# Altium PCB PowerSupply.PcbDoc
Units mm, origin at the board's own origin, x right, y up, seen from the top; angles counter-clockwise.
Board outline 68.61 x 30.48 mm, 2 copper layers (Top Layer, Bottom Layer), stack 1.586 mm thick; 29 components, 18 nets, 80 pads, 6 vias.
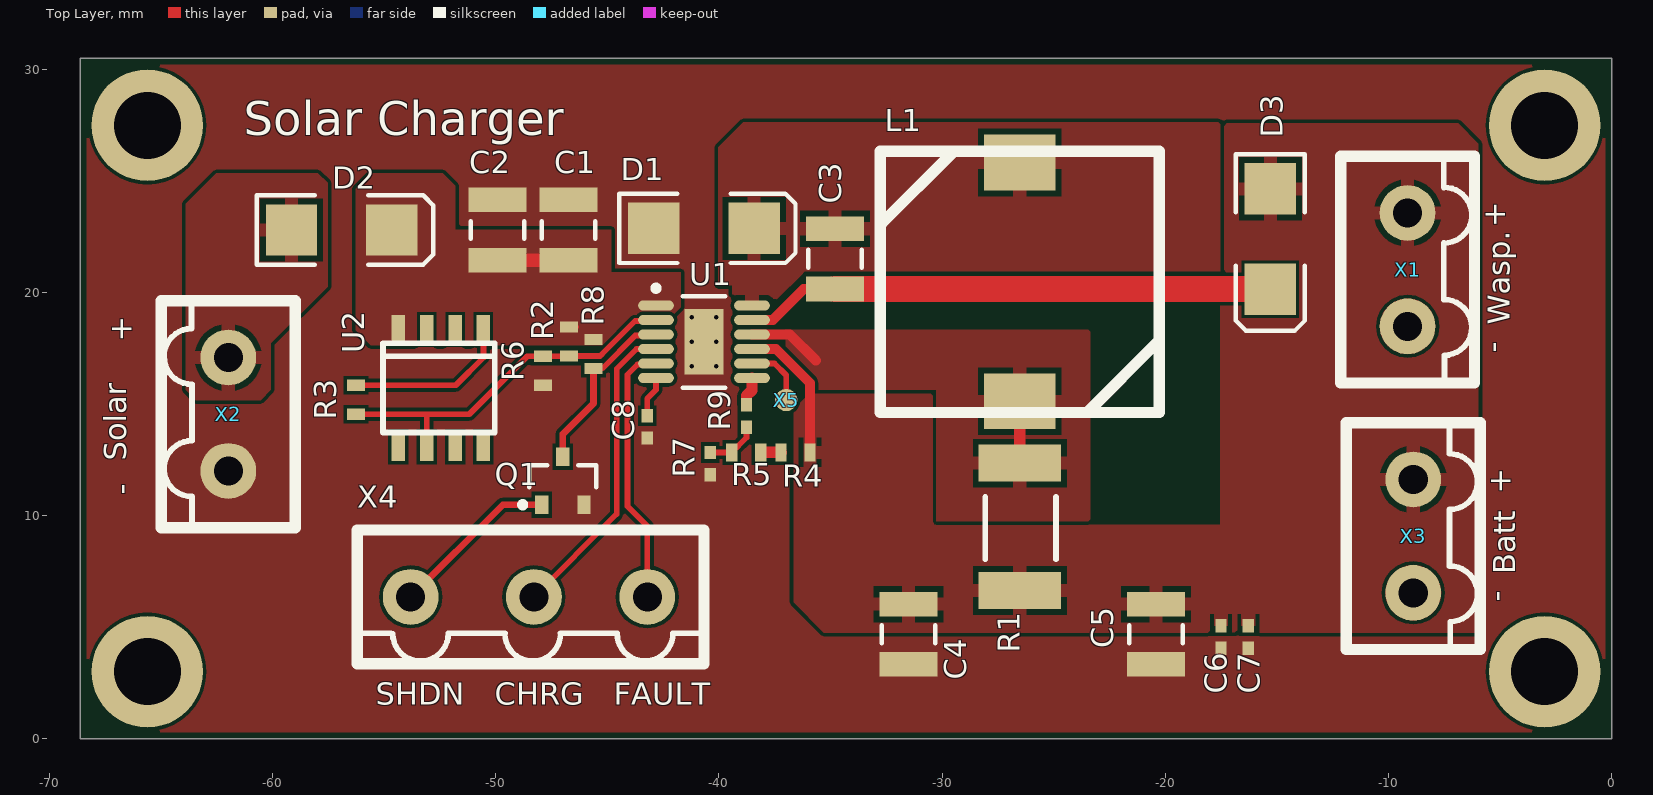
[diagram p0: Top Layer view]
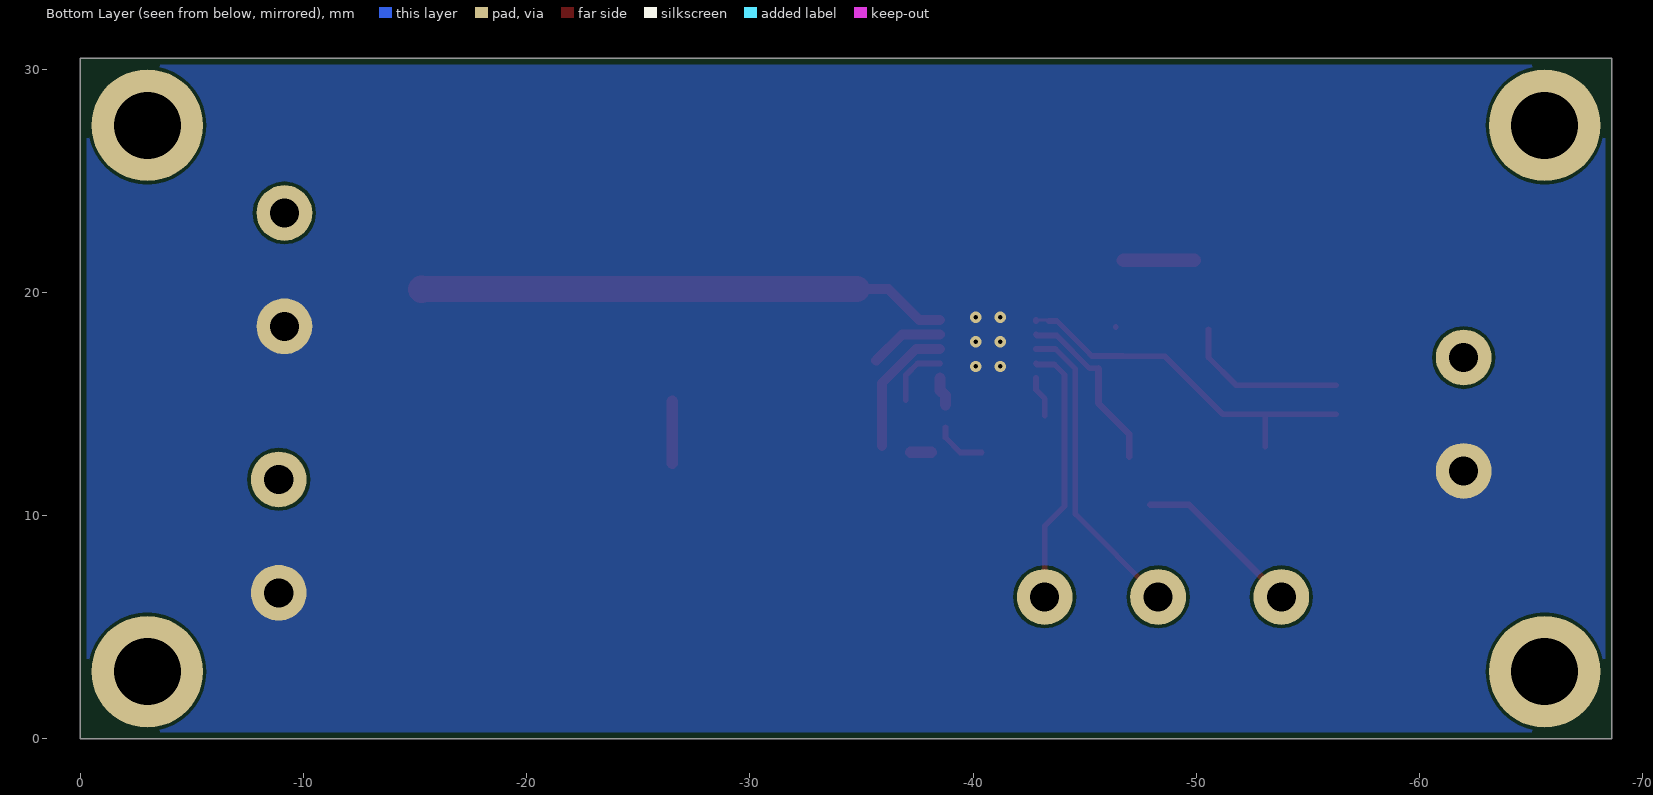
[diagram p1: Bottom Layer view, seen from below]

## Layer stack, top to bottom
Top Solder: solder mask 0.0102, Solder Resist, Dk 3.5
Top Layer: signal copper 0.018
Dielectric1: core 1.55, FR-4, Dk 4.8
Bottom Layer: signal copper 0.018
Bottom Solder: solder mask 0.0102, Solder Resist, Dk 3.5

## Board outline
-68.606,0 -68.606,30.48 0,30.48 0,0

## Design rules (kind name [scope] priority, off if disabled: settings)
Clearance Clearance-xPP-xTP-xTT [All] p1: gap=0.15
ComponentClearance [All] p1: gap=0.25 collisioncheckmode=3 verticalgap=0.25 showdistances=FALSE
DiffPairsRouting [All] p1: maxlimit=0.25 minlimit=0.25 mostfreqgap=0.25 toplayer_minwidth=0.381 toplayer_maxwidth=0.381 toplayer_prefwidth=0.381 bottomlayer_minwidth=0.381 bottomlayer_maxwidth=0.381 bottomlayer_prefwidth=0.381 maxuncoupledlength=12.5
Height [All] p1: minheight=0 maxheight=25 prefheight=12.5
HoleSize HoleSize-PTH [All] p1: absolutevalues=TRUE maxlimit=2 minlimit=0.25 maxpercent=80.000 minpercent=20.000
HoleToHoleClearance [All] p1: gap=0.15 allowstackedmicrovias=TRUE
MinimumAnnularRing "Minimum IAR  >0.45mm" [((ObjectKind = 'Pad') OR (ObjectKind = 'Via')) And (Layer = 'MultiLayer') And (HoleDiameter > AsMM(0.45))] p1: minimumring=0.25 // minimum inner annular ring for pads > 0.45mm finished hole size
MinimumAnnularRing "Minimum IAR <=0.45mm" [((ObjectKind = 'Pad') OR (ObjectKind = 'Via')) And (Layer = 'MultiLayer') And (HoleDiameter <= AsMM(0.45))] p2: minimumring=0.225 // minimum inner annular ring for pads <= 0.45mm finished hole size
MinimumSolderMaskSliver [All] p1: minsoldermaskwidth=0.1
PlaneClearance PlaneClearance-IPI [All] p1: clearance=0.4
PlaneConnect [All] p1: planeconnectstyle=Relief reliefexpansion=0.4 reliefentries=4 reliefconductorwidth=0.2 reliefairgap=0.2
PolygonConnect VinPolygonConnect [InNet('NetC1_2')] p1: connectstyle=Direct reliefconductorwidth=0.254 reliefentries=4 polygonreliefangle="90 Angle" airgapwidth=0.254
PolygonConnect "GND PolygonConnect" [InNet('GND')] p2: connectstyle=Direct reliefconductorwidth=0.508 reliefentries=4 polygonreliefangle="90 Angle" airgapwidth=0.254
PolygonConnect [All] p3: connectstyle=Relief reliefconductorwidth=0.61 reliefentries=4 polygonreliefangle="90 Angle" airgapwidth=0.254
RoutingCorners [All] p1: cornerstyle=45-Degree minsetback=2.5 maxsetback=2.5
RoutingVias "RoutingVias > 0.45mm" [(ObjectKind = 'Via') And (HoleDiameter > AsMM(0.45))] p1: holewidth=0.5 width=1 viastyle="Through Hole" minholewidth=0.45 minwidth=0.95 maxholewidth=0.9 maxwidth=1.4 // finishet hole size > 0.45mm
RoutingVias "RoutingVias <= 0.45mm" [(ObjectKind = 'Via') And (HoleDiameter <= AsMM(0.45))] p2: holewidth=0.3 width=0.8 viastyle="Through Hole" minholewidth=0.25 minwidth=0.7 maxholewidth=0.5 maxwidth=1 // finishet hole size <= 0.45mm
SilkToSilkClearance [All] p1: silktosilkclearance=0.2
SilkToSolderMaskClearance SilkscreenOverComponentPads [IsPad] p1: minsilkscreentomaskgap=0.2 clearancetoexposedcopper=TRUE
SolderMaskExpansion [All] p1: expansion=0.1
UnpouredPolygon [All] p1: allowunpoured=FALSE
Width Width-xTW [All] p1: maxlimit=1.5 minlimit=0.15 preferedwidth=0.2
18 further rules are at their usual default settings.

## Components (designator, comment, footprint, x,y, rotation, side; value= is the part's Value field where it differs from the comment)
C1 "10uF" C1210 -46.736,22.79 r270 top
C2 "10uF" C1210 -49.911,22.79 r270 top
C3 "1uF" C1210 -34.798,21.495 r90 top
C4 "10uF" C1210 -31.496,4.68 r90 top
C5 "1uF" C1210 -20.422,4.68 r90 top
C6 "100nF" 0402 -17.501,4.553 r90 top
C7 "100nF" 0402 -16.281,4.553 r90 top
C8 "680nF" 0402 -43.206,13.97 r90 top
D1 "D Schottky" SMB -40.666,22.86 r0 top
D2 "D Schottky" SMB -56.896,22.79 r0 top
D3 "D Schottky" SMB -15.291,22.384 r270 top
L1 "Inductor" LMX131J -26.518,25.813 r0 top
Q1 "MOSFET-N" Sot-23 -46.99,12.63 r90 top
R1 "151m" 2510 -26.518,6.636 r90 top
R2 "1K" 0603 -46.716,17.14 r90 top
R3 "1K" 0603 -56.261,14.535 r90 top
R4 "316K" 0603 -37.211,12.827 r0 top
R5 "1.2K" 0603 -39.421,12.827 r0 top
R6 "1K" 0603 -47.879,15.83 r90 top
R7 "1.18M" 0402 -40.386,12.319 r90 top
R8 "10k" 0603 -45.616,16.59 r90 top
R9 "3" 0402 -38.76,14.453 r90 top
U1 "LT3652EMSE#PBF" LT-MSE-12-EDP_N -40.666,17.78 r0 top
U2 "LM234Z-3" SO-8 -50.546,18.345 r180 top
X1 "WaspConnector" Wasp_Connector -9.144,23.552 r270 top
X2 "SolarConnector" SOLAR_CONNECTOR -61.976,11.995 r90 top
X3 "BatteryConnector" Battery_Connector -8.89,11.614 r270 top
X4 "Notification" NOTIFICATION_CONNECTOR -43.206,6.35 r180 top
X5 "LötPad" LötPad -36.982,15.17 r0 top

## Footprints (in the part's own frame and the unit in brackets; to place one, negate y for a bottom-side part, rotate by r counter-clockwise, add the part's x,y. Pads: shape width x height; smd on the part's side, far side on the other; paste and mask are expansions set on the pad)
0402 [mm] "Chip Capacitor, Body 1.0x0.5mm, IPC High Density"
  rect 0.6x0.5 smd: 1(-0.5,0) 2(0.5,0)
  body extent -0.55,-0.3 0.55,0.3, height 1.3
0603 [mm]
  rect 0.5x0.8 smd: 1(0,0) 2(1.3,0)
  body extent -0.06,-0.32 1.36,0.33, height 0.55
2510 [mm]
  rect 1.65x3.68 smd: 1(0,0) 2(5.71,0)
  silkscreen extent 1.4,-1.63 4.19,1.55
Battery_Connector [mm]
  round 2.5 hole 1.3: 1(0,0) 2(5.08,0)
  silkscreen extent -2.54,-3 7.75,3
C1210 [mm] "Chip Capacitor, Body 3.2x2.5mm, IPC High Density"
  rect 1.1x2.6 smd: 1(-1.35,0) 2(1.35,0)
  silkscreen extent -0.4,-1.2 0.4,1.2, body extent -1.7,-1.35 1.7,1.35, height 1.3
LMX131J [mm]
  rect 3.2x2.5 smd: 1(0,0) 2(0,-10.7)
  silkscreen extent -6.25,-11.2 6.25,0.5
LT-MSE-12-EDP_N [mm] "SOP, 12-Leads, Body 4.1x3.1mm, Pitch 0.65mm, Thermal Pad 2.95x1.76mm, IPC Medium Density"
  oval 1.6x0.45 smd: 1(-2.15,1.625) 2(-2.15,0.975) 3(-2.15,0.325) 4(-2.15,-0.325) 5(-2.15,-0.975) 6(-2.15,-1.625) 7(2.15,-1.625) 8(2.15,-0.975) 9(2.15,-0.325) 10(2.15,0.325) 11(2.15,0.975) 12(2.15,1.625)
  rect 1.76x2.95 smd: 13(0,0)
  silkscreen extent -2.27,-2.05 0.95,2.52, body extent -1.55,-2.05 1.55,2.05, height 1.1
LötPad [mm]
  round 1 smd: 1(0,0)
NOTIFICATION_CONNECTOR [mm]
  round 2.5 hole 1.3: 1(0,0) 2(5.08,0) 3(10.6,0)
  silkscreen extent -2.54,-3 13,3
SMB [mm] "DO-214-AA/SMB; 2 C-Bend Leads; Body 5.3 x 3.6 mm, inc. leads (LxW)"
  rect 2.3x2.3 smd: 1(-2.25,0) 2(2.25,0)
  silkscreen extent -3.8,-1.55 4.1,1.55
SO-8 [mm]
  rect 0.6x1.27 smd: 1(0,0) 2(1.27,0) 3(2.54,0) 4(3.81,0) 5(3.81,5.27) 6(2.54,5.27) 7(1.27,5.27) 8(0,5.27)
  silkscreen extent -0.5,0.63 4.5,4.63
SOLAR_CONNECTOR [mm]
  round 2.5 hole 1.3: 1(5.08,0) 2(0,0)
  silkscreen extent -2.54,-3 7.75,3
Sot-23 [mm]
  rect 0.85x0.6 smd: 1(0,0) 2(-2.15,0.95) 3(-2.15,-0.95)
  silkscreen extent -2.27,-1.5 -0.38,1.92, body extent -1.78,-1.5 -0.38,1.5, height 1.1
Wasp_Connector [mm]
  round 2.5 hole 1.3: 1(0,0) 2(5.08,0)
  silkscreen extent -2.54,-3 7.75,3

## Part data
C1 C2 C3 C4 C5 C6 C7 C8: library part "Cap Semi", "Capacitor"
D1 D2 D3: "Schottky Diode"
Q1: "N-Channel MOSFET"
R1 R2 R3 R4 R5 R6 R7 R8 R9: library part Res2, "Resistor"
U1: "Battery Charger for Solar Power"
U2: "3-Terminal Adjustable Current Source, 3-pin TO-92"
X1 X2 X3 X4: "Connector"
X5: "PAD"

## Free pads (board coordinates)
  round 5 hole 3: 1(-65.606,27.48) 2(-65.606,3) 3(-3,3) 4(-3,27.48)

## Via types
v1: diameter 0.5, hole 0.2, Top Layer to Bottom Layer, 6 vias

## Nets (pads, with @x,y where several pads share a name; then routed paths per layer and width w, separated by ;. In a path a pad name is that pad's centre, name@x,y a point inside that pad or via, vN(x,y) a via of type N, cw(c..) or ccw(c..) an arc to the next point about the centre after c; other vN are vias at no path point)
GND: C1.1 C2.1 C4.1 C5.1 C6.1 C7.1 C8.1 D1.1 Q1.3 R6.1 R7.1 U1.13 X1.2 X2.2 X3.2
  other v1: -41.216,16.68 -40.116,16.68 -41.216,17.78 -40.116,17.78 -41.216,18.88 -40.116,18.88
NetC1_2: C1.2 C2.2 D2.2 R2.2 R8.2 U1.1 U2.4 | length 3.2
  Top Layer w0.61: C2.2 C1.2
NetC3_1: C3.1 D3.2 U1.11 | length 23.8
  Top Layer w0.457: U1.11 -37.588,18.755 -36.199,20.145 C3.1
  Top Layer w1.168: C3.1 D3.2@-15.302,20.145
  Top Layer w1.219: D3.2@-15.302,20.145 D3.2
NetC3_2: C3.2 D1.2 L1.1 U1.12
NetC4_2: C4.2 C5.2 C6.2 C7.2 D3.1 R1.1 R4.2 U1.9 X1.1 X3.1 | length 6.1
  Top Layer w0.457: U1.9 -37.439,17.455 -35.916,15.932 -35.916,13.117 R4.2@-35.911,13.113
NetC8_2: C8.2 U1.6 | length 1.8
  Top Layer w0.254: C8.2 -43.206,15.24 -42.816,15.63 U1.6
NetL1_2: L1.2 R1.2 U1.10 | length 6.1
  Top Layer w0.457: U1.10 -36.819,18.105 -35.662,16.948
  Top Layer w0.508: R1.2 L1.2
NetQ1_1: Q1.1 R8.1 U1.3 | length 8
  Top Layer w0.254: R8.1 -45.216,16.59 -43.745,18.061 -42.86,18.061 U1.3
  Top Layer w0.305: Q1.1 -46.99,13.646 -45.616,15.02 R8.1
NetQ1_2: Q1.2 X4.3 | length 7.6
  Top Layer w0.305: X4.3 -49.676,10.48 Q1.2
NetR2_1: R2.1 R3.1 R6.2 U1.2 U2.6 | length 16.8
  Top Layer w0.152: U1.2@-43.551,18.755 U1.2
  Top Layer w0.254: R3.1 -53.086,14.535 ; U2.6 -53.086,14.535 ; R2.1@-46.726,17.13 R6.2 -48.586,17.13 -51.181,14.535 -53.086,14.535 ; R2.1 -45.324,17.14 -45.228,17.236 -43.749,18.715 U1.2@-43.391,18.715 ; U1.2@-42.816,18.711 U1.2
NetR3_2: R3.2 U2.1 | length 7.5
  Top Layer w0.254: R3.2 -51.786,15.835 -50.546,17.075 U2.1
NetR4_1: R4.1 R5.2 | length 0.9
  Top Layer w0.508: R5.2 R4.1
NetR5_1: R5.1 R7.2 R9.1 | length 2.4
  Top Layer w0.254: R7.2 -39.429,12.819 R5.1 -38.76,13.487 R9.1
NetR9_2: R9.2 U1.7 | length 1.3
  Top Layer w0.508: R9.2 -38.76,15.367 -38.516,15.611 U1.7
NetU1_4: U1.4 X4.2 | length 13.9
  Top Layer w0.254: X4.2 -44.577,10.059 -44.577,16.567 -43.689,17.455 U1.4
NetU1_5: U1.5 X4.1 | length 11.8
  Top Layer w0.254: X4.1 -43.206,9.525 -44.095,10.414 -44.095,16.308 -43.642,16.761 -42.86,16.761 U1.5
NetU1_8: U1.8 X5.1 | length 2.9
  Top Layer w0.254: U1.8 -37.504,16.805 -36.982,16.284 X5.1
VIN: D2.1 X2.1
pads on no net: U2.2 U2.3 U2.5 U2.7 U2.8

## Polygon pours and split planes (outlines as drawn)
NetC4_2 on Top Layer "Top Layer-No Net" (solid, remove dead copper, pour order 14): -36.652,14.738 -36.652,6.102 -35.306,4.756 -5.969,4.756 -5.969,26.651 -6.883,27.565 -17.526,27.565 -17.526,9.582 -30.378,9.582 -30.378,15.449 -35.941,15.449
NetL1_2 on Top Layer "Top Layer-No Net" (solid, remove dead copper, pour order 11): -37.008,18.32 -23.368,18.32 -23.368,9.734 -30.251,9.734 -30.251,15.627 -36.982,15.627 -37.008,15.653 -37.008,18.345
NetC1_2 on Top Layer "Top Layer-No Net" (solid, remove dead copper, pour order 15): -56.261,24.644 -56.261,18.294 -55.601,17.634 -43.409,17.634 -41.707,19.336 -41.707,20.885 -44.831,20.885 -44.831,22.79 -51.816,22.79 -51.816,24.771 -52.375,25.33 -55.575,25.33
VIN on Top Layer "Top Layer-No Net" (solid, remove dead copper, pour order 12): -60.528,15.17 -63.424,15.17 -63.881,15.627 -63.881,23.958 -62.509,25.33 -57.963,25.33 -57.531,24.898 -57.531,20.25 -60.071,17.71 -60.071,15.627
GND on Top Layer "Top Layer-No Net" (solid, remove dead copper, pour order 16): -68.566,30.44 0,30.44 0,0 -68.606,0 -68.606,30.48
NetC3_2 on Top Layer "Top Layer-No Net" (solid, remove dead copper, pour order 10): -39.396,19.405 -39.396,20.32 -40.031,20.32 -40.031,26.498 -38.913,27.616 -17.526,27.616 -17.526,20.936 -36.144,20.936 -37.675,19.405
GND on Bottom Layer "VIN" (solid, remove dead copper, pour order 13): -68.606,30.48 -68.606,0 0,0 0,30.48

## Silkscreen, mask and mechanical layers (free items; w line width, h text height)
Top Overlay:
  text "Solar Charger" at -61.29,27.026 h1.52
Mechanical 1:
  the board outline again, w0.254
  text ".Pcb_File_Name_No_Path" at -68.504,-1.118 h1

## Text inside footprints (layer, text, board x,y; h text height)
X1: Top Overlay "Wasp." at -4.572,18.542 h1 r90; Top Overlay "+" at -5.644,24.052 h1 r270; Top Overlay "-" at -5.588,17.78 h1 r270
X2: Top Overlay "Solar" at -66.548,12.446 h1 r90; Top Overlay "+" at -66.294,17.78 h1 r90; Top Overlay "-" at -66.294,10.922 h1 r90
X3: Top Overlay "-" at -5.43,6.634 h1 r270; Top Overlay "+" at -5.39,12.114 h1 r270; Top Overlay "Batt" at -4.318,7.366 h1 r90
X4: Top Overlay "CHRG" at -50.038,1.524 h1; Top Overlay "FAULT" at -44.704,1.524 h1; Top Overlay "SHDN" at -55.372,1.524 h1